# Altium PCB PCB2.PcbDoc
Units mil, origin at the board's own origin, x right, y up, seen from the top; angles counter-clockwise.
Board outline 6000 x 4000 mil, 2 copper layers (Top Layer, Bottom Layer); 12 components, 19 nets, 65 pads, 4 vias.
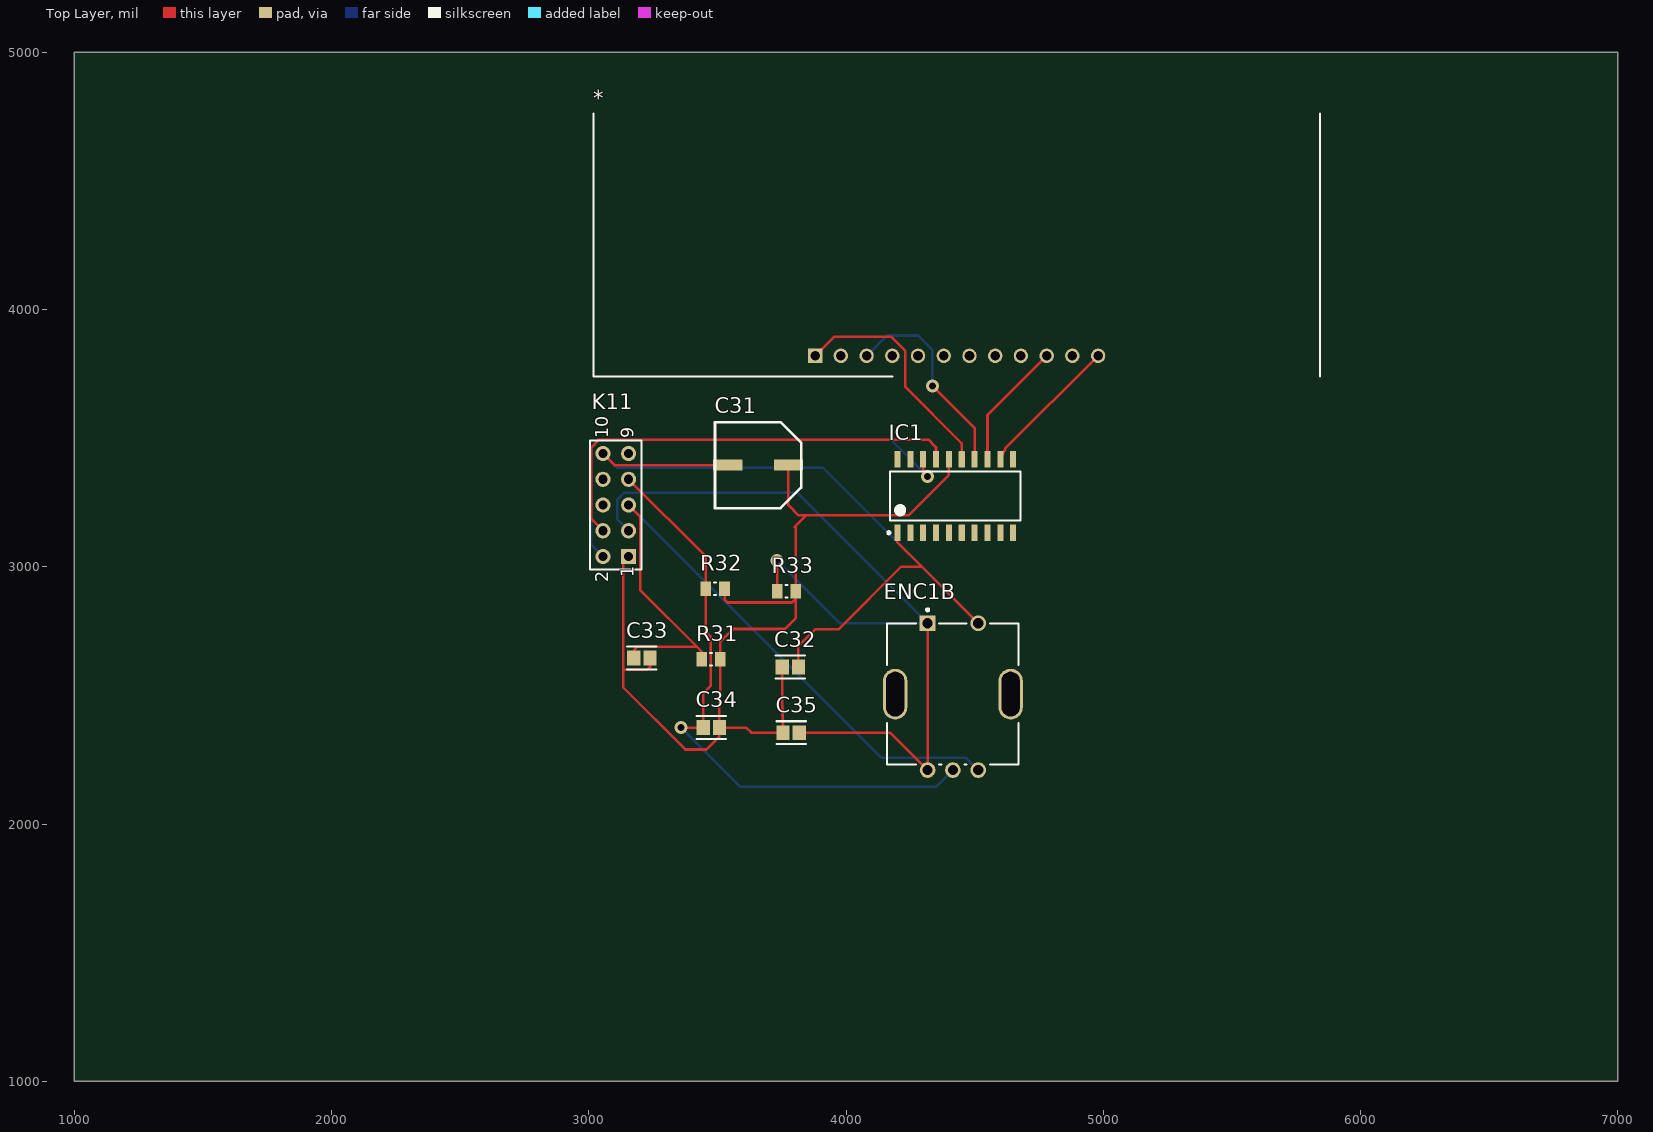
[diagram p0: Top Layer view]
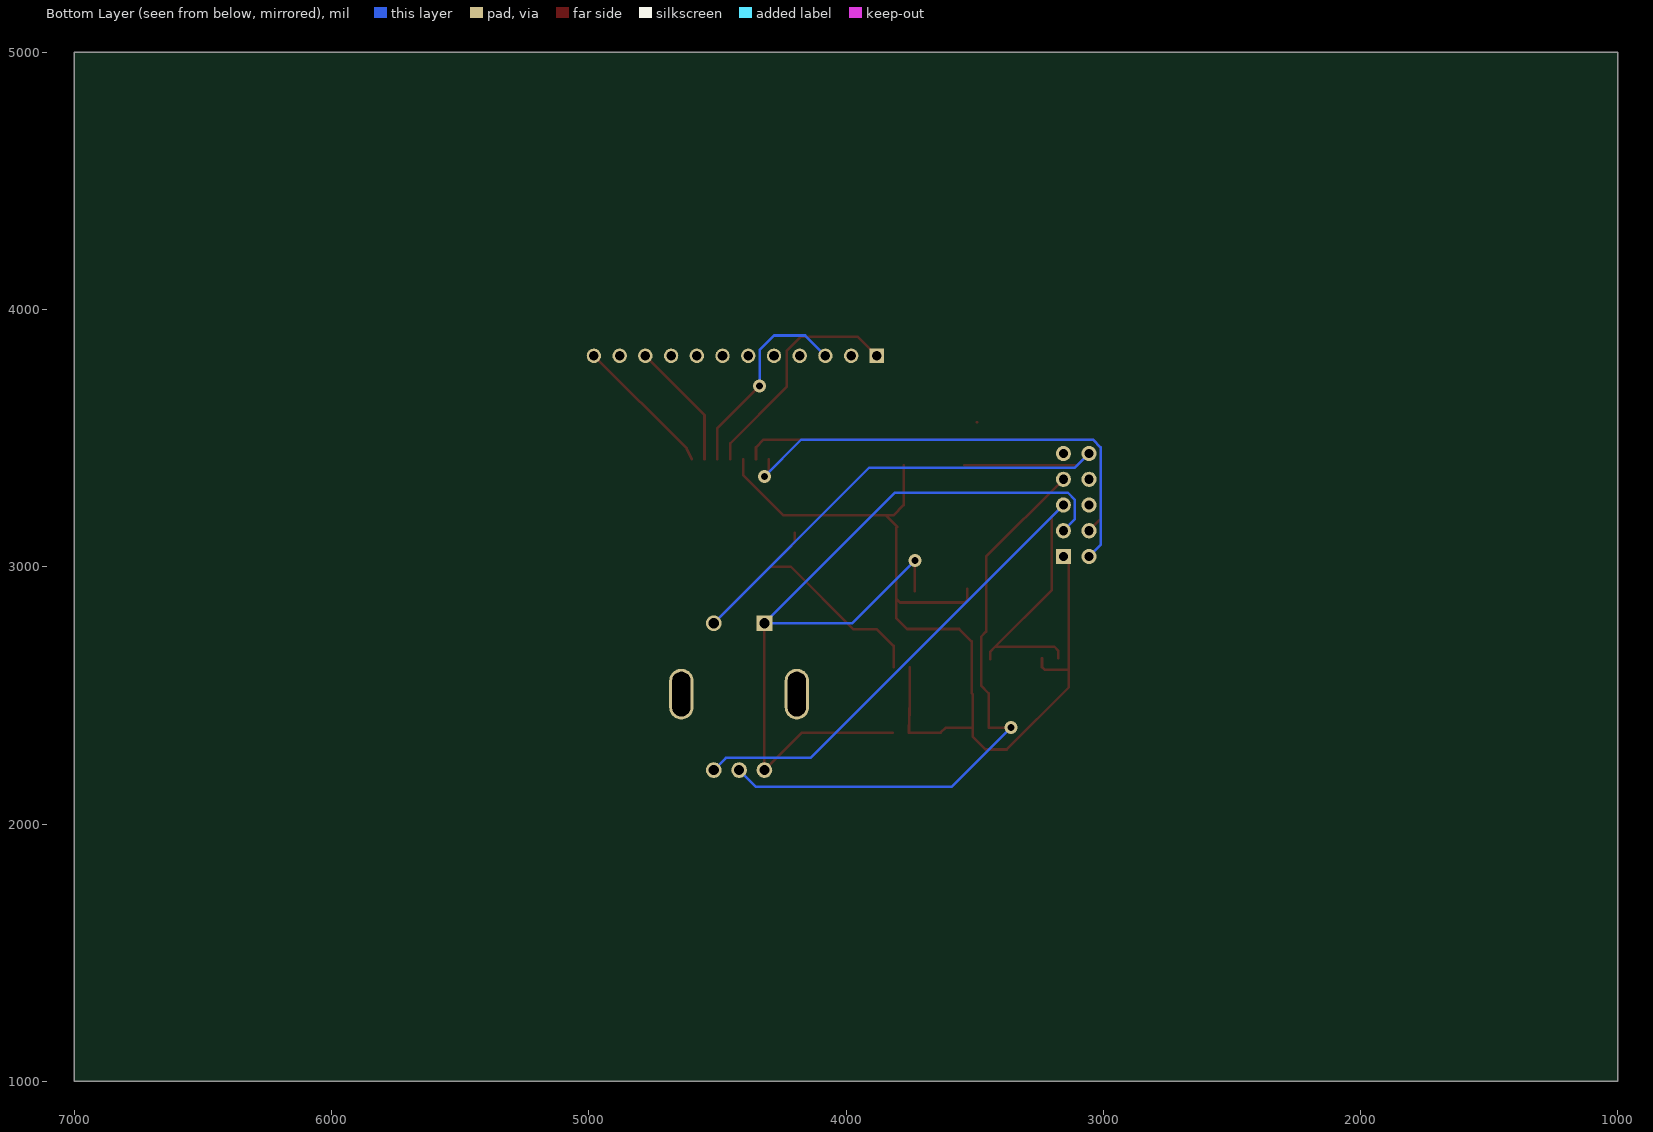
[diagram p1: Bottom Layer view, seen from below]

## Layer stack, top to bottom
Top Solder: solder mask 0.4, Solder Resist, Dk 3.5
Top Layer: signal copper 1.4
Dielectric 1: dielectric 12.6, FR-4, Dk 4.8
Bottom Layer: signal copper 1.4
Bottom Solder: solder mask 0.4, Solder Resist, Dk 3.5

## Board outline
1000,1000 7000,1000 7000,5000 1000,5000

## Design rules (kind name [scope] priority, off if disabled: settings)
Clearance [All] p1: gap=10 ignorepadtopadclearanceinfootprint=FALSE except(0: Arc-Hole Track-Hole SMDPad-Hole THPad-Hole Via-Hole Fill-Hole Poly-Hole Region-Hole Text-Hole)
PolygonConnect [All] p1: connectstyle=Relief reliefconductorwidth=10 reliefentries=4 polygonreliefangle="90 Angle" airgapwidth=10
RoutingVias [All] p1: holewidth=28 width=50 viastyle="Through Hole" minholewidth=28 minwidth=50 maxholewidth=28 maxwidth=50
SolderMaskExpansion [All] p1: expansion=4 istentingtop=FALSE
Width [All] p1: maxlimit=10 minlimit=10 preferedwidth=10
30 further rules are at their usual default settings.

## Components (designator, comment, footprint, x,y, rotation, side; value= is the part's Value field where it differs from the comment)
* "segement display" 7-SIGMENT 4180,3820 r90 top
C31 "100µ 50V" CE_D8_L10 3658.11,3395 r0 top
C32 "100n" CC_0805_L 3783.47,2610 r0 top value="0.22 μF"
C33 "10n" CC_0805_L 3206.53,2645 r180 top value="0.22 μF"
C34 "10n" CC_0805_L 3476.53,2375 r180 top value="0.22 μF"
C35 "10n" CC_0805_L 3786.53,2355 r0 top value="0.22 μF"
ENC1B "ROTARY_ENCODER" PEC11R_4220F_S0012 4415.59,2505 r0 top
IC1 "TM1637" SOP_20_M 4425,3275 r90 top
K11 "Header 5X2" HDR2X5 3155,3040 r90 top
R31 "10kΩ" R_0805_M 3475,2640 r0 top
R32 "10kΩ" R_0805_M 3491.42,2915 r0 top
R33 "10kΩ" R_0805_M 3768.58,2905 r0 top

## Footprints (in the part's own frame and the unit in brackets; to place one, negate y for a bottom-side part, rotate by r counter-clockwise, add the part's x,y. Pads: shape width x height; smd on the part's side, far side on the other; paste and mask are expansions set on the pad)
7-SIGMENT [mm]
  rect 1.425x1.425 hole 0.95: 1(0,7.62)
  round 1.425 hole 0.95: 2(0,5.08) 3(0,2.54) 4(0,0) 5(0,-2.54) 6(0,-5.08) 7(0,-7.62) 8(0,-10.16) 9(0,-12.7) 10(0,-15.24) 11(0,-17.78) 12(0,-20.32)
  silkscreen extent -2.02,-42.23 23.93,29.53
CC_0805_L [mil]
  rect 51.36x57.33 smd paste+0 mask+0: 1(-31.53,0) 2(31.53,0)
  silkscreen extent -57,-44 57,44, body extent -67,-39 67,39, height 10
CE_D8_L10 [mm]
  rect 2.9x1.1 smd: 1(-3,0) 2(3,0)
  Top Layer lines w0.254: -4.259,4.25 -4.25,4.241
  silkscreen extent -4.26,-4.25 4.25,4.25
HDR2X5 [mm] "Connector; Header; 5x2 Position"
  rect 1.5x1.5 hole 0.9: 1(0,0)
  round 1.5 hole 0.9: 2(0,2.54) 3(2.54,0) 4(2.54,2.54) 5(5.08,0) 6(5.08,2.54) 7(7.62,0) 8(7.62,2.54) 9(10.16,0) 10(10.16,2.54)
  silkscreen extent -1.27,-1.27 11.43,3.81
PEC11R_4220F_S0012 [mm]
  rect 1.55x1.55 hole 1 paste-1000 mask+0: 1(-2.5,7)
  round 1.55 hole 1 paste-1000 mask+0: 2(2.5,7) A(-2.5,-7.5) B(2.5,-7.5) C(0,-7.5)
  rrect100% 2.4x5 hole 4.4 slot 1.8 at 0 deg paste-1000 mask+0: 3(-5.7,0) 4(5.7,0)
  silkscreen extent -6.5,-6.95 6.5,8.45, body extent -7,-8.37 7,7.88, height 0.25
R_0805_M [mm] "Chip Resistor, 2-Leads, Body 2.00x1.25mm, IPC Medium Density"
  rect 1.05x1.45 smd: 1(-0.925,0) 2(0.925,0)
  silkscreen extent -0.1,-0.62 0.1,0.62, body extent -1.1,-0.72 1.1,0.72, height 0.5
SOP_20_M [mm] "SOIC,20-Leads,Body 12.9x5.6mm,Pitch 1.27mm,IPC Medium Density"
  rrect17% 1.65x0.6 smd: 1(-3.625,5.715) 2(-3.625,4.445) 3(-3.625,3.175) 4(-3.625,1.905) 5(-3.625,0.635) 6(-3.625,-0.635) 7(-3.625,-1.905) 8(-3.625,-3.175) 9(-3.625,-4.445) 10(-3.625,-5.715) 11(3.625,-5.715) 12(3.625,-4.445) 13(3.625,-3.175) 14(3.625,-1.905) 15(3.625,-0.635) 16(3.625,0.635) 17(3.625,1.905) 18(3.625,3.175) 19(3.625,4.445) 20(3.625,5.715)
  silkscreen extent -3.75,-6.45 2.4,6.69, body extent -2.8,-6.45 2.8,6.45, height 2

## Part data
C31: library part Capacitor_Electrolytic, Manufacturer=Panasonic, Max Operating Temperature="105 degC", Min Operating Temperature="-55 degC", Package Quantity=500, Voltage Rating="25 V", ComponentLink1Description="Manufacturer URL", ComponentLink1URL=http://www.panasonic.com/, ComponentLink2Description=Datasheet, ComponentLink2URL=http://industrial.panasonic.com/cdbs/www-data/pdf/RDE0000/ABA0000C1181.pdf, DatasheetVersion=03/2016, Height="10.2 mm", Lead Pitch="3.1 mm", Length="10.2 mm", Mount="Surface Mount", Mounting Technology="Surface Mount", PackageDescription="2-Pin Electrolytic Aluminum Capacitor, Body 8.3 x 8.3 mm", PackageReference=EEE-FK1E221P, Packaging="Tape and Reel", Pins=2, REACH SVHC="No SVHC", RoHSCompliant=true
C32 C33 C34 C35: library part Capacitor_Ceramic, Capacitance="0.22 μF", Manufacturer=KEMET, Manufacturer Part Number=C0805C224K5RACTU, Package=C0805C-DN, Temperature="-55°C to +125°C", Temperature Characteristic=X7R, Temperature Coefficient=30ppm/°C, Temperature Range High=+125°C, Temperature Range Low=-55°C, Tolerance=0.1, Voltage Rating="50 V", Automotive=No, Category=Cap, ComponentLink2Description=Datasheet, ComponentLink2URL=https://content.kemet.com/datasheets/KEM_C1003_C0G_SMD.pdf, Device Class L1="Passive Components", Device Class L2=Capacitors, Device Class L3="Ceramic Capacitors", Digikey Description="CAP CER 0.22UF 50V X7R 0805", Height=0.88mm, Ipc Land Pattern Name=CAPC200125X78, Lead Free=Yes, Material=Ceramic, Mouser Description="CAP CER 0.22UF 50V X7R 0805", Octopart=https://octopart.com/c0805c224k5ractu-kemet-144670, RoHS=TRUE
ENC1B: Current Rating=10mA, Manufacturer=Bourns, Manufacturer Part Number=PEC11R-4015F-N0024, Package=0, Temperature="-30°C to +70°C", Temperature Range High=+70°C, Temperature Range Low=-30°C, Voltage Rating Dc=5V, Automotive=No, Category=Enc, ComponentLink2Description=Datasheet, ComponentLink2URL=https://www.bourns.com/docs/product-datasheets/pec11r.pdf?sfvrsn=bb617cbf_7, Conn Orientation=Vertical, Detent=No, Device Class L1=Electromechanical, Device Class L2=Switches, Device Class L3=Encoders, Digikey Description="ROTARY ENCODER MECHANICAL 24PPR", Encoder Type=Incremental, Height=22.3mm, Lead Free=Yes, Mouser Description="Encoders 15mm SHAFT NO SWITCH", Number Of Circuits=1, Octopart=https://octopart.com/pec11r-4015f-n0024-bourns-26648251, Pulses Per Rev=24, RoHS=TRUE
IC1: "LED Drive Control Special Circuit", Package=Package, Availability="Not in stock", Check_prices=https://www.snapeda.com/parts/TM1637/Titan+Micro+Electronics/view-part/?ref=eda, MF="Titan Micro Electronics", MP=TM1637, Price=None, SnapEDA_Link=https://www.snapeda.com/parts/TM1637/Titan+Micro+Electronics/view-part/?ref=snap
K11: "Header, 5-Pin, Dual row", LatestRevisionDate=17-Jul-2002, LatestRevisionNote="Re-released for DXP Platform.", Publisher="Altium Limited"
R31 R32 R33: library part Resistor, Manufacturer="Vishay Dale", Part Number=CRCW08050000Z0EA

## Via types
v1: diameter 50, hole 28, Top Layer to Bottom Layer, 4 vias

## Nets (pads, with @x,y where several pads share a name; then routed paths per layer and width w, separated by ;. In a path a pad name is that pad's centre, name@x,y a point inside that pad or via, vN(x,y) a via of type N, cw(c..) or ccw(c..) an arc to the next point about the centre after c; other vN are vias at no path point)
+5: C31.2 C32.1 C33.1 C34.1 C35.1 IC1.16 K11.1 R31.2 R32.2 R33.2 | length 4040
  Top Layer w10: K11.1 3134,3019 3134,2600 ; C33.1 3238.05,2610 3228.05,2600 3134,2600 ; R32.2 3527.83,2873.17 3540,2861 3790,2861 3805,2876 ; C32.1 3751.95,2485.05 C35.1 3632,2355 3612,2375 C34.1 ; C31.2 3776.22,3240 3816.22,3200 3845,3200 ; IC1.16 4400,3356.98 4243.02,3200 3845,3200 ; 3134,2600 3134,2531 3375.29,2289.71 3457.76,2289.71 3508.05,2340 C34.1 ; C34.1 3508.05,2505 3511.42,2508.36 R31.2 3511.42,2709.42 3560,2758 3763,2758 3805,2800 3805,2876 ; 3805,2876 R33.2 3805,3150 3800,3155 3845,3200
GND: C31.1 C32.2 ENC1B.2 IC1.1 K11.10 | length 3406.7
  Top Layer w10: K11.10 3100,3395 C31.1 ; C32.2 3815,2692 3880,2757 3971.61,2757 4214.61,3000 4294.61,3000 ; IC1.1 4200,3094.61 4294.61,3000 ; ENC1B.2 4294.61,3000
  Bottom Layer w10: K11.10 3110,3385 3909.61,3385 ENC1B.2
Net*_1: *.1 IC1.15 | length 917.3
  Top Layer w10: *.1 3955,3895 4175,3895 4230,3840 4230,3700 4450,3480 IC1.15
"Net*_2 - C": IC1.4
Net*_3: *.3 IC1.14 | length 805.1
  Top Layer w10: v1(4336,3703) 4500,3539 IC1.14
  Bottom Layer w10: *.3 4159,3899 4280,3899 4336,3843 v1(4336,3703)
"Net*_4 - B": IC1.3
"Net*_5 - D": IC1.5
"Net*_6 - DP": IC1.9
"Net*_7 - E": IC1.6
"Net*_8 - F": IC1.7
"Net*_9 - G": IC1.8
Net*_10: *.10 IC1.13 | length 497.6
  Top Layer w10: IC1.13 4550,3590 *.10
"Net*_11 - A": IC1.2
Net*_12: *.12 IC1.12 | length 556
  Top Layer w10: IC1.12 4619,3459 *.12
NetC33_2: C33.2 ENC1B.B K11.5 R31.1 | length 2783.4
  Top Layer w10: K11.5 3200,3195 3200,2909 3420,2689 ; C33.2 3175,2674 3190,2689 3420,2689 ; R31.1 3438.58,2670.42 3420,2689
  Bottom Layer w10: K11.5 4138,2257 4466.74,2257 ENC1B.B
NetC34_2: C34.2 ENC1B.C K11.7 R32.1 | length 2375.5
  Top Layer w10: K11.7 3455,3040 R32.1 3455,2748 3475,2728 3475,2538 3445,2508 C34.2 v1(3359,2375)
  Bottom Layer w10: v1(3359,2375) 3590,2144 4349.87,2144 ENC1B.C
NetC35_2: C35.2 ENC1B.1 ENC1B.A K11.3 R33.1 | length 3502.6
  Top Layer w10: R33.1 v1(3732.17,3024) ; C35.2 4171.89,2355 ENC1B.A ENC1B.1
  Bottom Layer w10: K11.3 3110,3185 3110,3260 3138,3288 3809.76,3288 ENC1B.1 3975.58,2780.59 v1(3732.17,3024)
NetIC1_17: IC1.17 K11.4 | length 1753.8
  Top Layer w10: K11.4 3010,3185 3010,3464 3040,3494 4320,3494 4350,3464 IC1.17
NetIC1_18: IC1.18 K11.2 | length 1895.1
  Top Layer w10: IC1.18 4300,3368 v1(4317,3351)
  Bottom Layer w10: K11.2 3010,3085 3010,3464 3040,3494 4174,3494 v1(4317,3351)
pads on no net: *.2 *.4 *.5 *.6 *.7 *.8 *.9 *.11 ENC1B.3 ENC1B.4 IC1.10 IC1.11 IC1.19 IC1.20 K11.6 K11.8 K11.9

## Text inside footprints (layer, text, board x,y; h text height)
K11: Top Overlay "10" at 3075,3500 h50 r90; Top Overlay "9" at 3175,3500 h50 r90; Top Overlay "1" at 3175,2960 h50 r90; Top Overlay "2" at 3075,2940 h50 r90